# Altium PCB LEDringTHErightWAY.PcbDoc
Units mm, origin at the board's own origin, x right, y up, seen from the top; angles counter-clockwise.
Board outline 60 x 60 mm, 2 copper layers (Top Layer, Bottom Layer); 21 components, 7 nets, 42 pads, 0 vias.
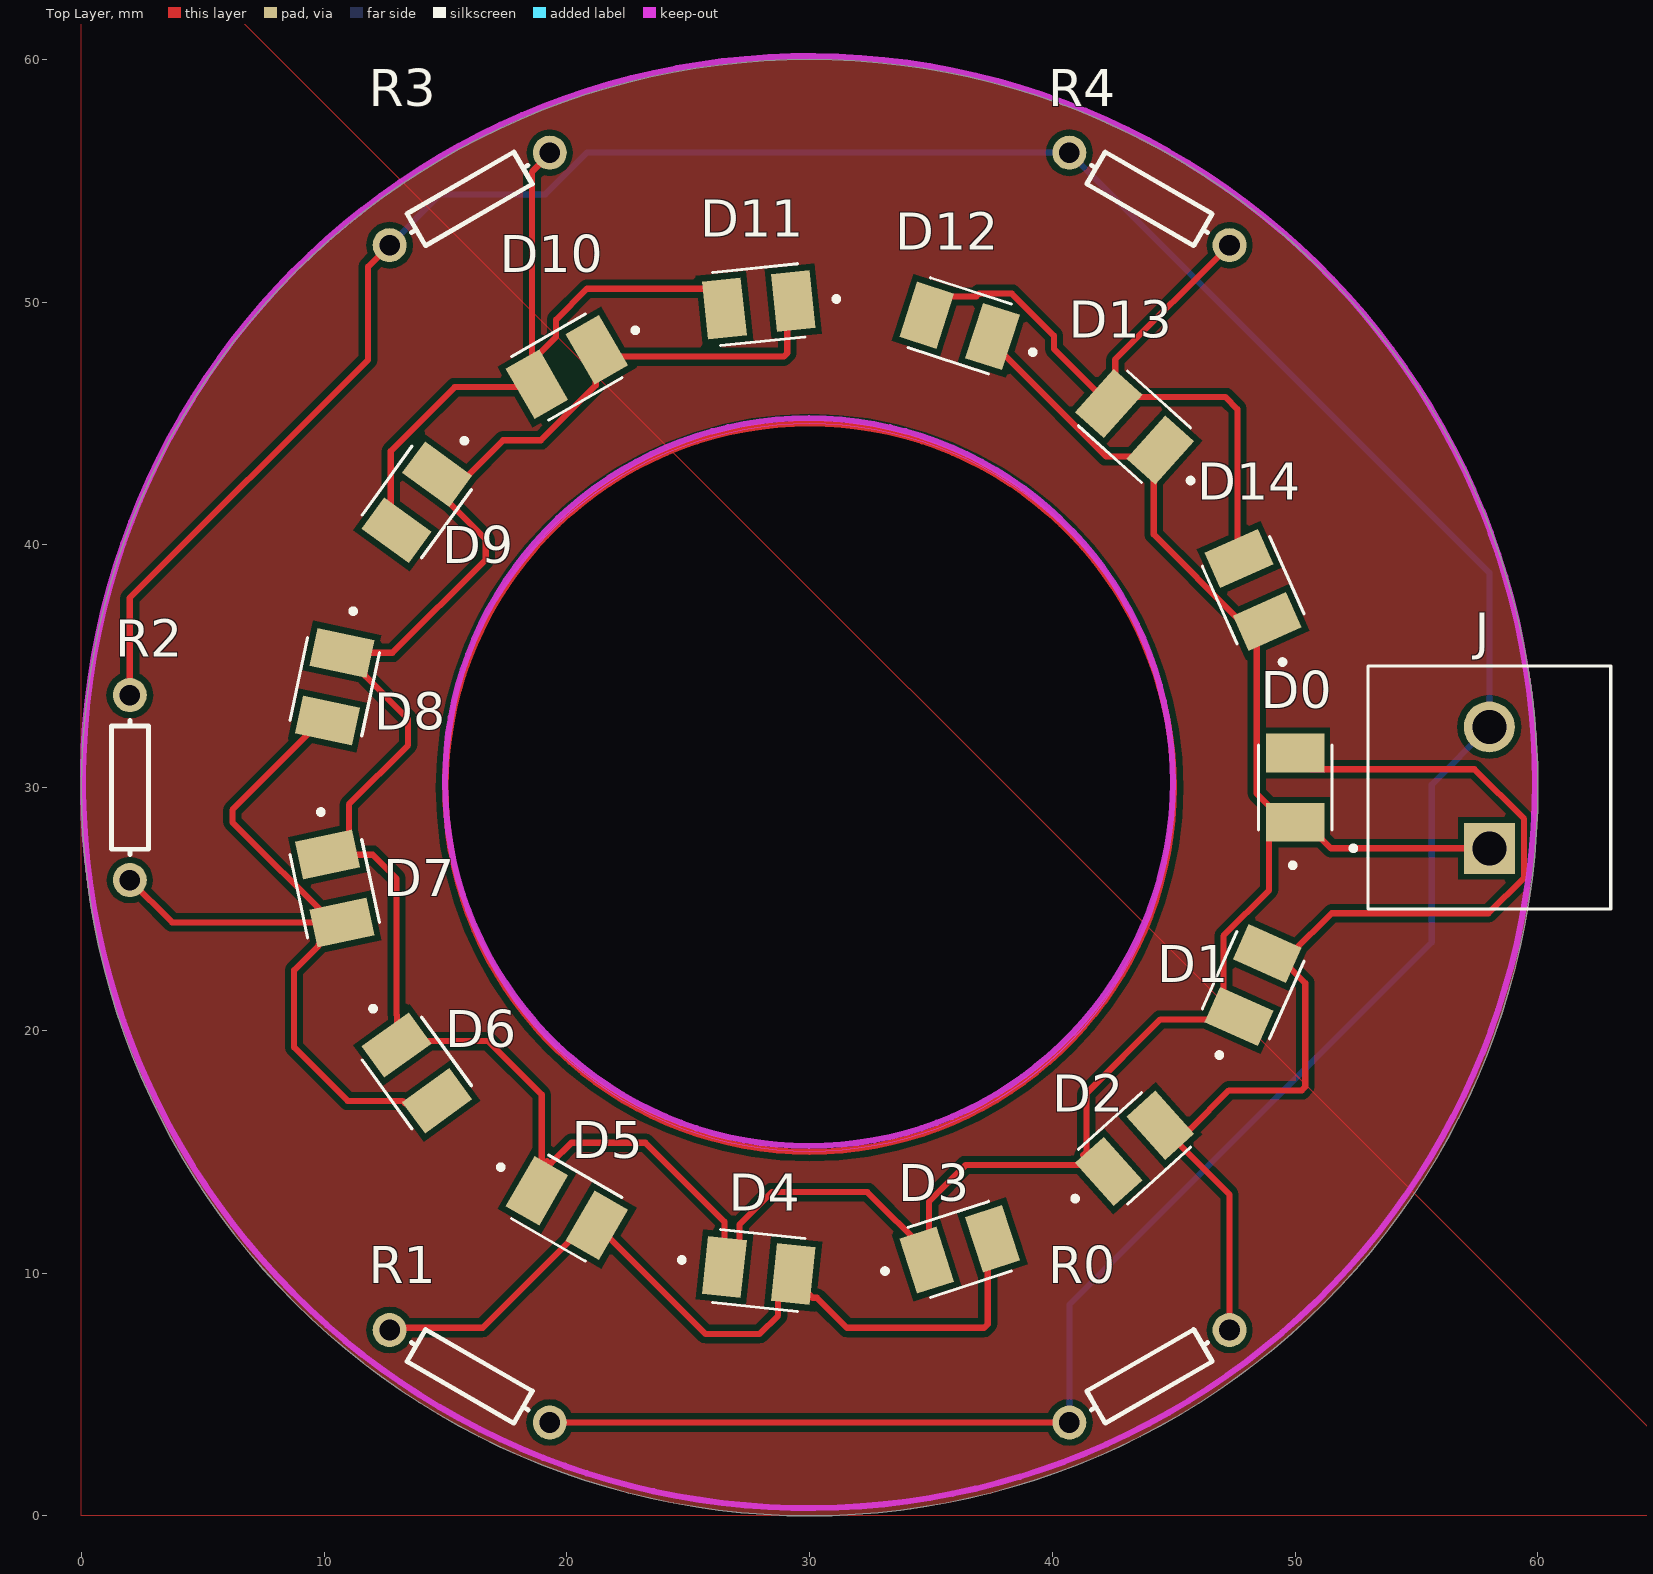
[diagram p0: Top Layer view]
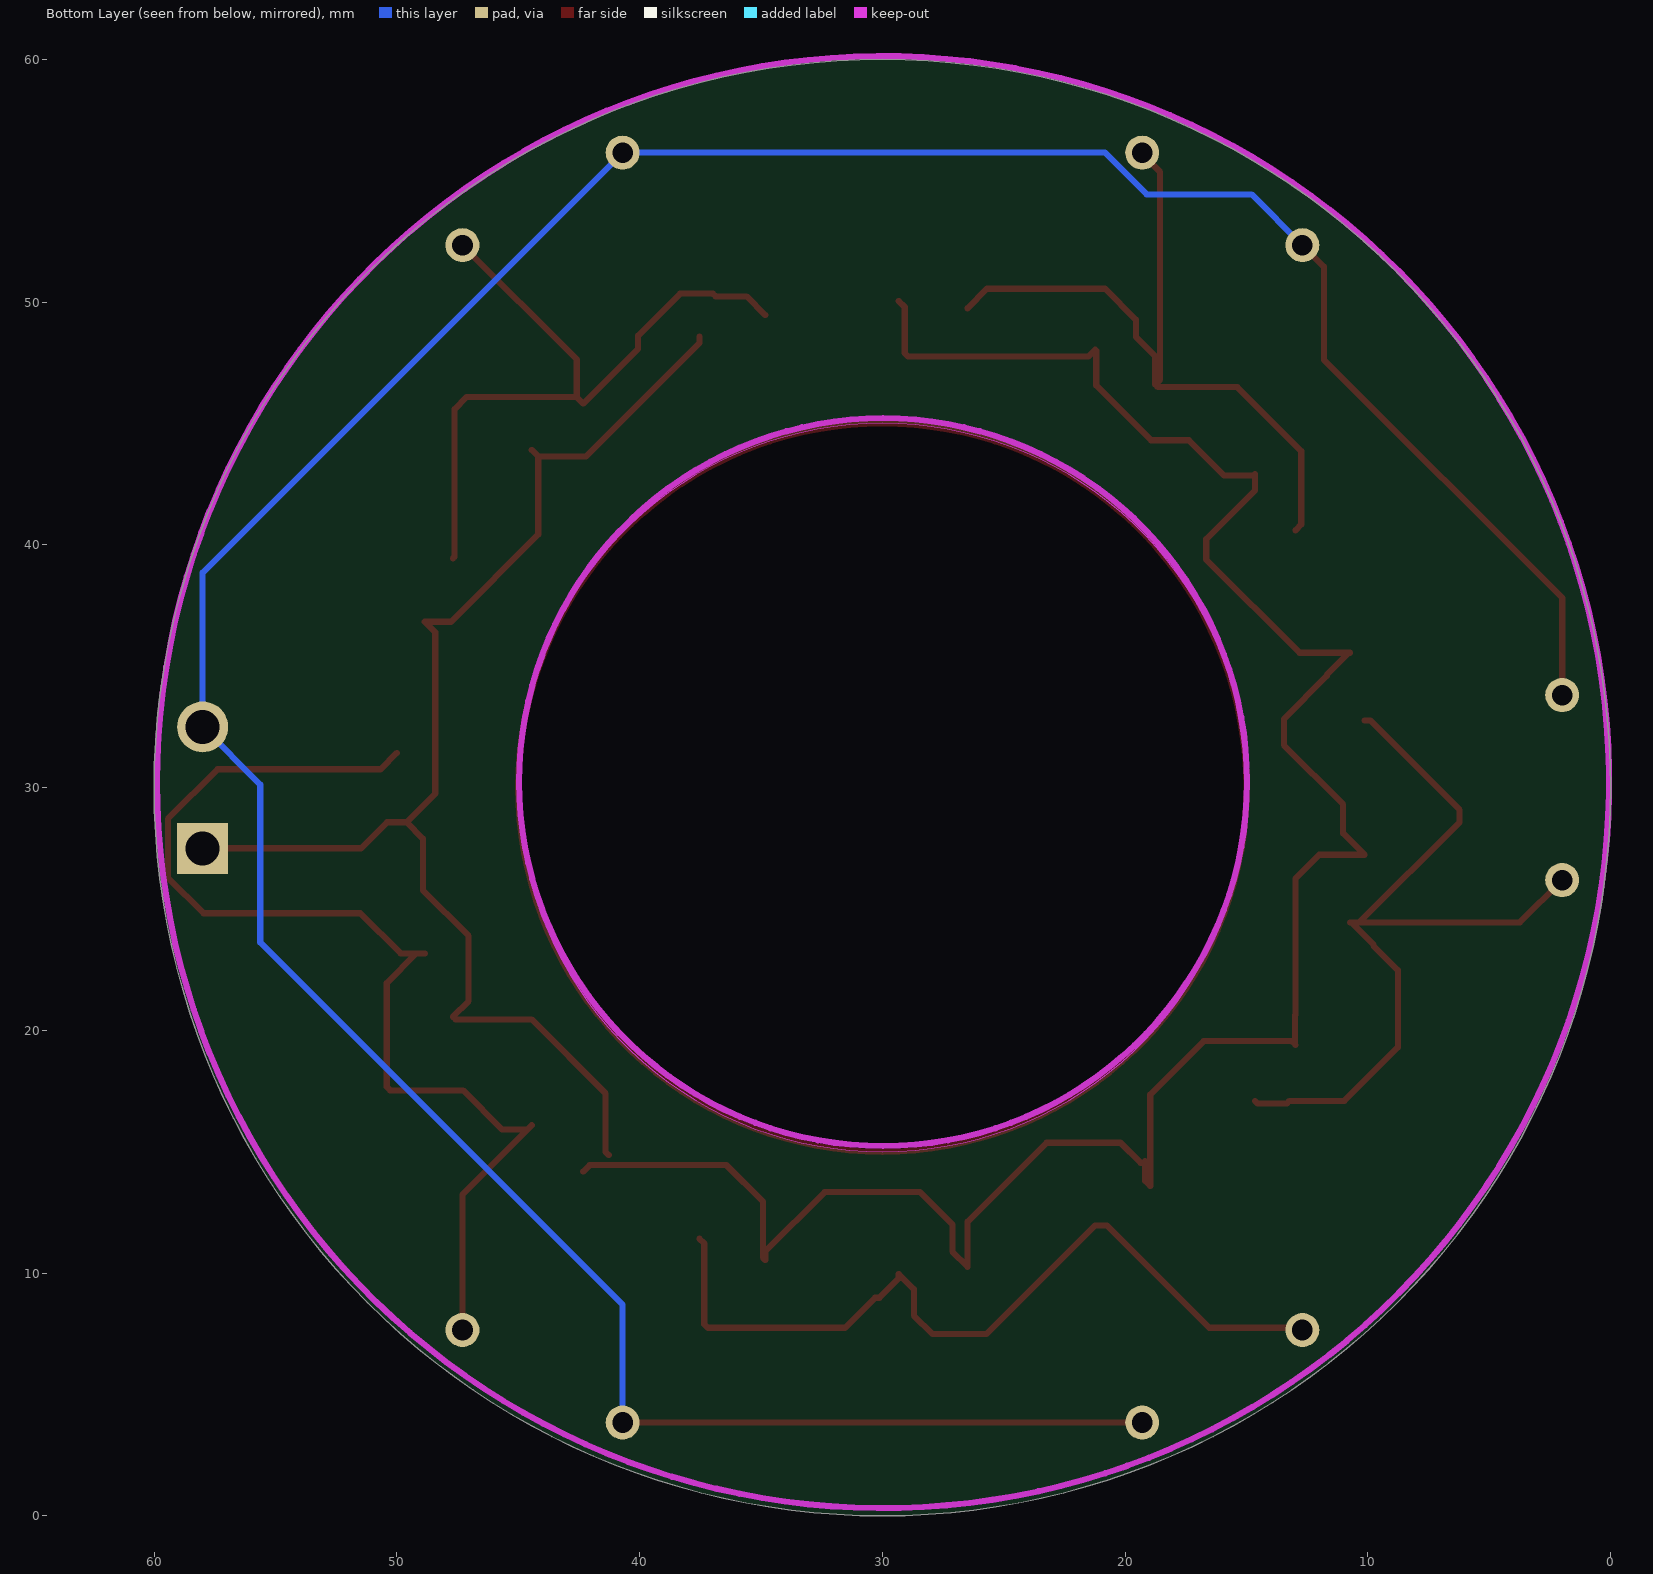
[diagram p1: Bottom Layer view, seen from below]
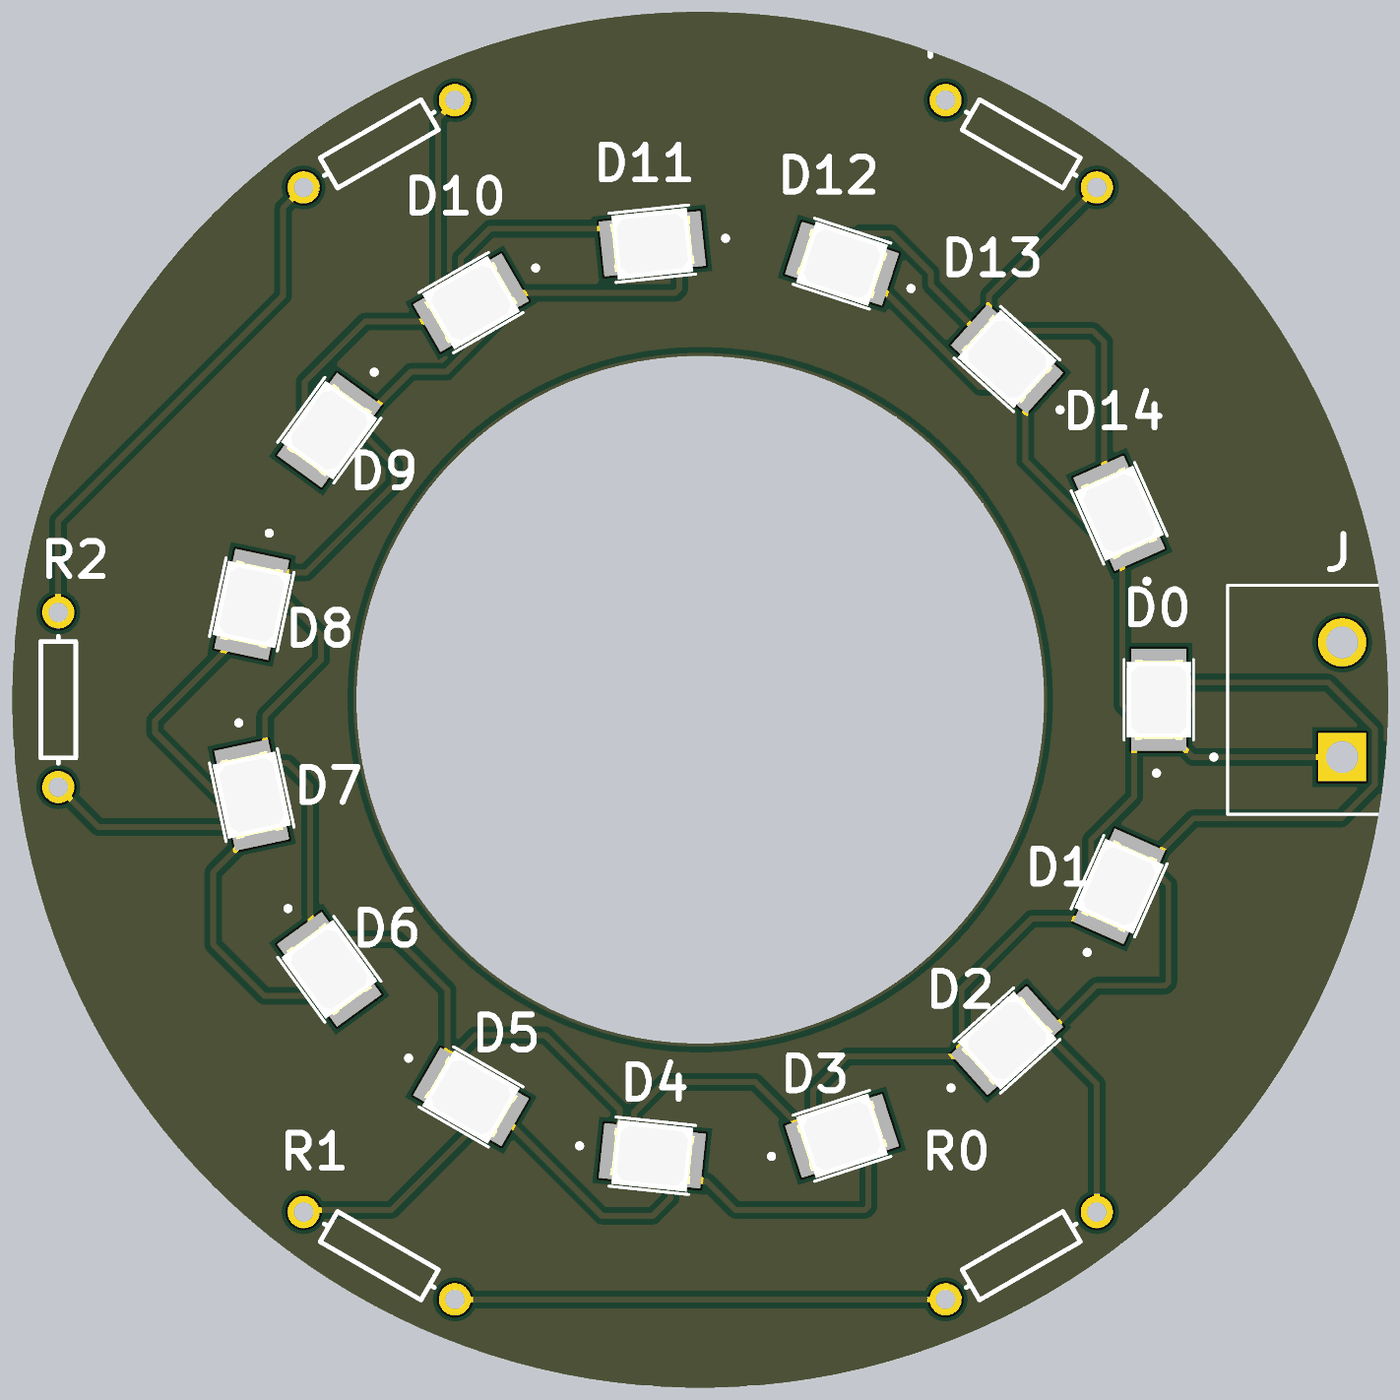
[diagram p2: 3D render of the assembled board from above, using the file's embedded part models]

## Layer stack, top to bottom
Top Solder: solder mask 0.0102, Solder Resist, Dk 3.5
Top Layer: signal copper 0.0356
Dielectric 1: dielectric 0.32, FR-4, Dk 4.8
Bottom Layer: signal copper 0.0356
Bottom Solder: solder mask 0.0102, Solder Resist, Dk 3.5

## Board outline
30,0 cw(c30,30) 0,30 cw(c30,30) 30,60 cw(c30,30) 60,30 cw(c30,30)
cut-out: 30,15 cw(c30,30) 15,30 cw(c30,30) 30,45 cw(c30,30) 45,30 cw(c30,30)

## Design rules (kind name [scope] priority, off if disabled: settings)
Clearance [All] p1: gap=0.254 ignorepadtopadclearanceinfootprint=FALSE except(0: Arc-Hole Track-Hole SMDPad-Hole THPad-Hole Via-Hole Fill-Hole Poly-Hole Region-Hole Text-Hole)
PolygonConnect [All] p1: connectstyle=Relief reliefconductorwidth=0.254 reliefentries=4 polygonreliefangle="90 Angle" airgapwidth=0.254
RoutingVias [All] p1: holewidth=0.711 width=1.27 viastyle="Through Hole" minholewidth=0.711 minwidth=1.27 maxholewidth=0.711 maxwidth=1.27
SolderMaskExpansion [All] p1: expansion=0.102 istentingtop=FALSE
Width [All] p1: maxlimit=0.254 minlimit=0.254 preferedwidth=0.254
30 further rules are at their usual default settings.

## Components (designator, comment, footprint, x,y, rotation, side; value= is the part's Value field where it differs from the comment)
D0 "OF-SMD3528WC" LED_OF-SMD3528WC 50,30 r90 top
D1 "OF-SMD3528WC" LED_OF-SMD3528WC 48.271,21.865 r66 top
D2 "OF-SMD3528WC" LED_OF-SMD3528WC 43.383,15.137 r42 top
D3 "OF-SMD3528WC" LED_OF-SMD3528WC 36.18,10.979 r18 top
D4 "OF-SMD3528WC" LED_OF-SMD3528WC 27.909,10.11 r354 top
D5 "OF-SMD3528WC" LED_OF-SMD3528WC 20,12.679 r330 top
D6 "OF-SMD3528WC" LED_OF-SMD3528WC 13.82,18.244 r306 top
D7 "OF-SMD3528WC" LED_OF-SMD3528WC 10.437,25.842 r282 top
D8 "OF-SMD3528WC" LED_OF-SMD3528WC 10.437,34.158 r258 top
D9 "OF-SMD3528WC" LED_OF-SMD3528WC 13.82,41.756 r234 top
D10 "OF-SMD3528WC" LED_OF-SMD3528WC 20,47.321 r210 top
D11 "OF-SMD3528WC" LED_OF-SMD3528WC 27.909,49.89 r186 top
D12 "OF-SMD3528WC" LED_OF-SMD3528WC 36.18,49.021 r162 top
D13 "OF-SMD3528WC" LED_OF-SMD3528WC 43.383,44.863 r138 top
D14 "OF-SMD3528WC" LED_OF-SMD3528WC 48.271,38.135 r114 top
J "282856-2" TE_282856-2 58,30 r90 top
R0 "Res1" AXIAL-0.3 44,5.751 r210 top value=1K
R1 "Res1" AXIAL-0.3 16,5.751 r330 top value=1K
R2 "Res1" AXIAL-0.3 2,30 r90 top value=1K
R3 "Res1" AXIAL-0.3 16,54.249 r210 top value=1K
R4 "Res1" AXIAL-0.3 44,54.249 r150 top value=1K

## Footprints (in the part's own frame and the unit in brackets; to place one, negate y for a bottom-side part, rotate by r counter-clockwise, add the part's x,y. Pads: shape width x height; smd on the part's side, far side on the other; paste and mask are expansions set on the pad)
AXIAL-0.3 [mm] "Axial Device, Thru-Hole; 2 Leads; 0.3 in Pin Spacing"
  round 1.4 hole 0.85: 1(-3.81,0) 2(3.81,0)
  silkscreen extent -2.77,-0.76 2.77,0.76
LED_OF-SMD3528WC [mm]
  rect 1.6x2.4 smd: 1(-1.425,0) 2(1.425,0)
  silkscreen extent -3.3,-1.51 1.75,1.51, body extent -1.75,-1.4 1.75,1.4, height 0.75
TE_282856-2 [mm]
  rect 2.1x2.1 hole 1.4: 1(-2.5,0)
  round 2.1 hole 1.4: 2(2.5,0)
  silkscreen extent -5,-5 5,5.7

## Part data
D0 D1 D2 D3 D4 D5 D6 D7 D8 D9 D10 D11 D12 D13 D14: "LED; SMD; 3528, PLCC2; white cold; 1700-2500mcd; 120Â°; 2", Package="PLCC-2 Optoflash", Availability=Unavailable, Check_prices=https://www.snapeda.com/parts/OF-SMD3528WC/Optoflash/view-part/702333/?ref=eda, MF=Optoflash, MP=OF-SMD3528WC, Price=None, SnapEDA_Link=https://www.snapeda.com/parts/OF-SMD3528WC/Optoflash/view-part/702333/?ref=snap
J: "TERMI-BLOK PCB MOUNT 2P", Package=None, Digi-Key_Part_Number=A98108-ND, Digi-Key_Purchase_URL=https://www.digikey.com/product-detail/en/te-connectivity-amp-connectors/1-282856-2/A98108-ND/1826971?utm_source=snapeda&utm_medium=aggregator&utm_campaign=symbol, EU_RoHS_Compliance="Compliant with Exemptions", MF="TE Connectivity", MP=282856-2, SnapEDA_Link=https://www.snapeda.com/parts/282856-2/TE%20Connectivity%20AMP%20Connectors/view-part/1809079/?ref=snap, TE_purchase_URL=https://www.te.com/usa-en/product-282856-2.html?te_bu=Cor&te_type=disp&te_campaign=seda_glo_cor-seda-global-disp-prtnr-fy19-seda-model-bom-cta_sma-317_1&elqCampaignId=32493
R0 R1 R2 R3 R4: "Resistor", LatestRevisionDate=17-Jul-2002, LatestRevisionNote="Re-released for DXP Platform.", PackageDescription="Axial Device, Thru-Hole; 2 Leads; 0.3 in Pin Spacing", PackageReference=AXIAL-0.3, Published=8-Jun-2000, Publisher="Altium Limited"

## Nets (pads, with @x,y where several pads share a name; then routed paths per layer and width w, separated by ;. In a path a pad name is that pad's centre, name@x,y a point inside that pad or via, vN(x,y) a via of type N, cw(c..) or ccw(c..) an arc to the next point about the centre after c; other vN are vias at no path point)
NetD0_1: D0.1 D1.1 D2.1 D3.1 D4.1 D5.1 D6.1 D7.1 D8.1 D9.1 D10.1 D11.1 D12.1 D13.1 D14.1 J.1 | length 153.4
  Top Layer w0.254: D8.1 D8.1@10.783,35.552 ; D6.1 D6.1@13.004,19.419 ; D11.1 29.083,49.796 29.083,47.901 28.934,47.752 21.515,47.752 D10.1 21.194,47.993 21.194,46.565 18.933,44.304 17.373,44.304 15.919,42.85 14.715,42.85 D9.1 14.657,42.236 16.659,40.235 16.659,39.392 12.819,35.552 D8.1@10.783,35.552 ; D12.1 37.536,48.312 42.206,43.642 D13.1@44.174,43.642 ; 41.275,14.859 41.402,14.986 41.402,17.399 44.451,20.448 47.576,20.448 D1.1 47.048,21.207 47.048,23.893 48.927,25.772 48.927,27.902 D0.1@49.6,28.575 ; D2.1 42.056,14.451 36.422,14.451 34.925,12.954 34.925,10.638 D3.1 34.825,10.895 32.385,13.335 28.448,13.335 27.119,12.006 27.119,10.885 D4.1 26.492,12.116 23.241,15.367 20.193,15.367 19.368,14.542 19.24,14.542 19.177,14.605 19.177,13.803 18.966,13.592 18.966,17.356 16.764,19.558 13.143,19.558 D6.1@13.004,19.419 ; D13.1 D13.1@44.174,43.642 ; J.1 51.475,27.5 50.4,28.575 D0.1 D0.1@49.6,28.575 ; D8.1@10.783,35.552 11.688,34.647 11.688,34.597 13.462,32.823 13.462,31.75 11.021,29.309 11.021,28.116 D7.1 12.007,27.236 12.982,26.261 12.982,20.645 13.004,20.623 D6.1@13.004,19.419 ; D13.1@44.174,43.642 44.174,40.425 47.766,36.833 D14.1 48.419,36.401 48.419,29.756 D0.1@49.6,28.575
NetD0_2: D0.2 D1.2 D2.2 R0.1 | length 47.2
  Top Layer w0.254: R0.1 47.3,13.233 D2.2 44.62,15.912 45.659,15.912 47.274,17.526 50.27,17.526 50.419,17.675 50.419,21.949 D1.2@49.201,23.167 ; D1.2 D1.2@49.201,23.167 ; D0.2 50.673,30.752 57.387,30.752 59.431,28.708 59.431,26.292 57.964,24.825 51.507,24.825 49.85,23.167 D1.2@49.201,23.167
NetD3_2: D3.2 D4.2 D5.2 R1.1 | length 34.7
  Top Layer w0.254: R1.1@12.573,7.747 16.54,7.747 20.76,11.967 D5.2 25.708,7.493 27.94,7.493 28.7,8.253 28.7,9.334 D4.2 29.327,9.781 30.121,8.987 30.3,8.987 31.54,7.747 37.189,7.747 37.338,7.896 37.338,11.222 D3.2
NetD6_2: D6.2 D7.2 D8.2 R2.1 | length 34.1
  Top Layer w0.254: R2.1 3.742,24.448 D7.2@10.35,24.448 ; D8.2 9.904,32.764 6.223,29.083 6.223,28.575 D7.2@10.35,24.448 ; D7.2 D7.2@10.683,24.448 ; D6.2 14.547,16.981 13.343,16.981 13.232,17.091 10.976,17.091 8.763,19.304 8.763,22.478 9.778,23.493 9.778,23.543 D7.2@10.683,24.448 ; D7.2@10.35,24.448 D7.2@10.683,24.448
NetD9_2: D9.2 D10.2 D11.2 R3.1 | length 31.2
  Top Layer w0.254: D9.2 12.747,40.838 12.747,43.862 15.381,46.496 18.654,46.496 D10.2 ; R3.1 19.3,56.092 18.566,55.359 18.566,46.808 D10.2 ; D11.2 26.492,49.752 25.698,50.546 20.828,50.546 19.56,49.278 19.56,48.569 18.766,47.775 D10.2
NetD12_2: D12.2 D13.2 D14.2 R4.1 | length 30.1
  Top Layer w0.254: D12.2 35.592,50.229 36.866,50.229 36.988,50.35 38.331,50.35 40.067,48.614 40.067,48.073 D13.2 D13.2@42.591,46.084 ; R4.1 42.591,47.635 D13.2@42.591,46.084 ; D14.2 47.625,39.503 47.625,45.593 47.134,46.084 D13.2@42.591,46.084
NetJ_2: J.2 R0.2 R1.2 R2.2 R3.2 R4.2 | length 140.5
  Top Layer w0.254: R2.2 2,37.814 11.811,47.625 11.811,51.454 R3.2 ; R1.2 40.604,3.846 R0.2@40.64,3.81
  Bottom Layer w0.254: R3.2 14.793,54.436 19.11,54.436 20.828,56.154 R4.2 58,38.854 J.2 55.626,30.126 55.626,23.622 40.7,8.696 R0.2
copper on no net: | length 94.2
  Top Layer w0.254: 45,30 ccw(c30,30) 45,30

## Polygon pours and split planes (outlines as drawn)
no net on Top Layer "NONET_L01_P002" (solid, pour order 2): 0,5.842
no net on Top Layer "NONET_L01_P001" (solid, pour order 1): 0,68.199 68.199,0 0,0
no net on Top Layer "Top Layer-No Net" (solid, pour order 0): 30,0 cw(c30,30) 0,30 cw(c30,30) 30,60 cw(c30,30) 60,30 cw(c30,30)

## Keep-outs
Keep-Out Layer:
  circle w0.254: c29.972,30.226 r14.991
  circle w0.254: c29.972,30.226 r29.904